# Allegro board steppernug_interface.brd
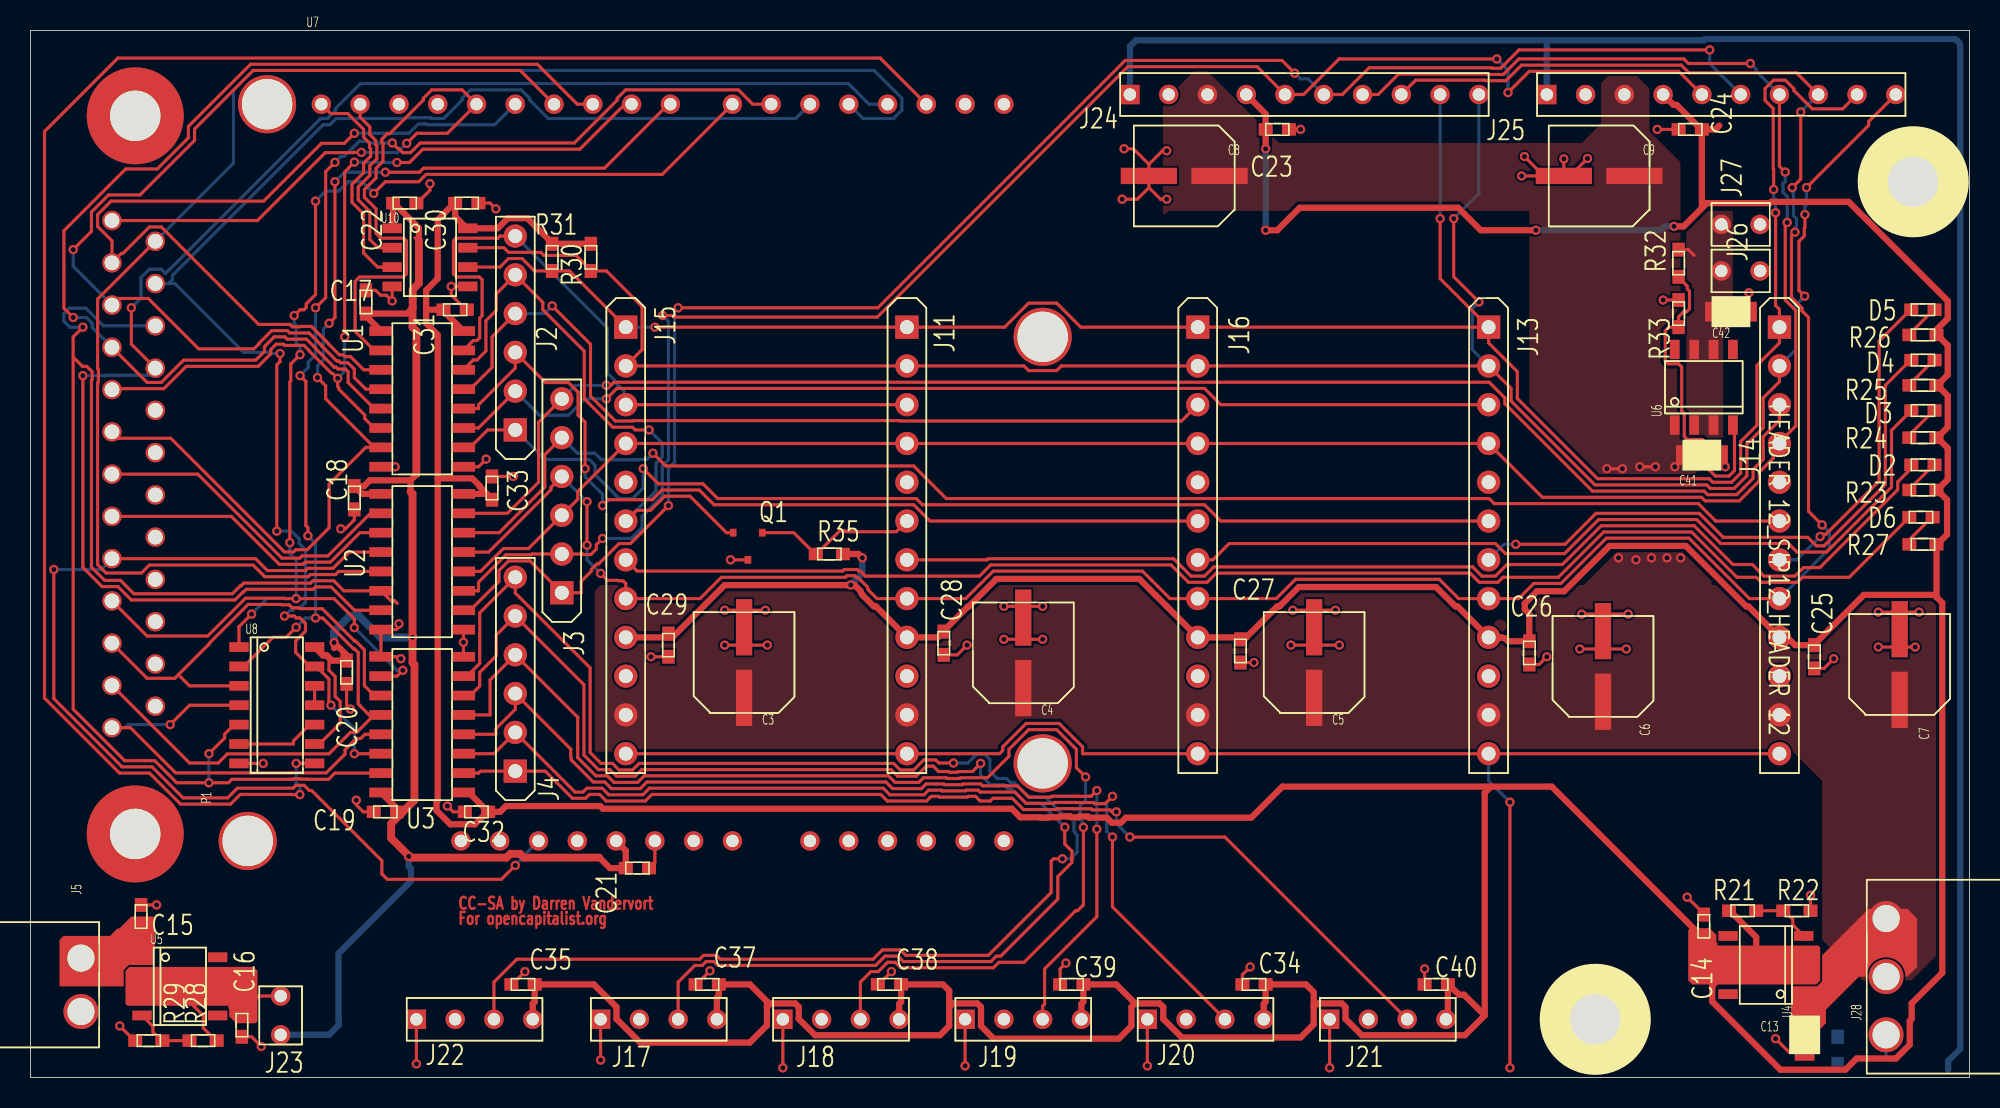
[diagram p0: board, top side]
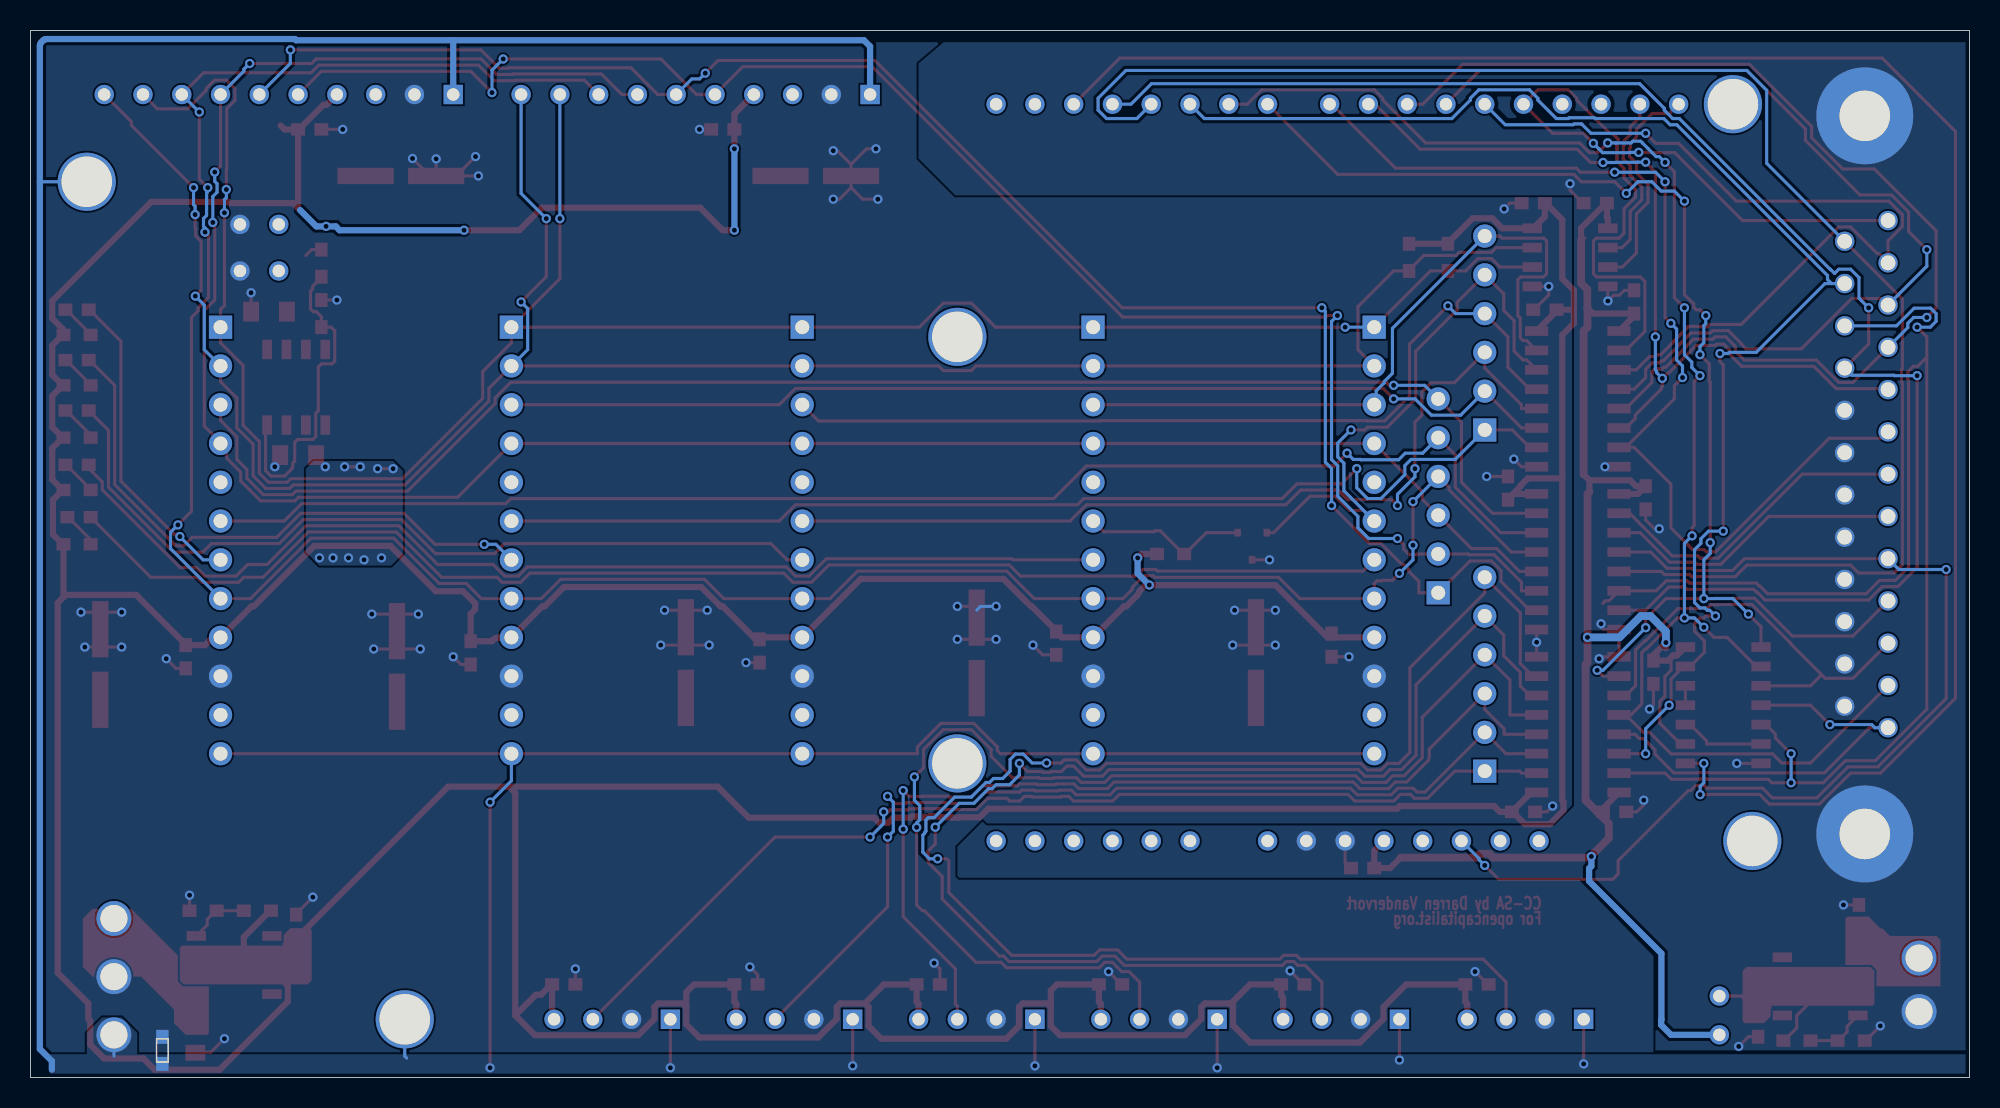
[diagram p1: board, bottom side, seen from below]

Outline 127 x 68.58 mm; copper layers: TOP, BOTTOM. Coordinates in mm from the lower left corner of the outline.
Outline path: 0,68.58 127,68.58 127,0 0,0 0,68.58

## Design rules (mm)
nets with their own width: min track width 0.406; nets VCC_PROTECT VCC_REG

## Placement (name value [footprint] x y rotation side)
C3  47u  [SMD_ELECTRO6_3MM_CAP]  46.74 27.18 0 top
C4  47u  [SMD_ELECTRO6_3MM_CAP]  65.02 27.81 0 top
C5  47u  [SMD_ELECTRO6_3MM_CAP]  84.07 27.18 0 top
C6  47u  [SMD_ELECTRO6_3MM_CAP]  103 26.92 0 top
C7  47u  [SMD_ELECTRO6_3MM_CAP]  122.43 27.05 0 top
C8  47u  [SMD_ELECTRO6_3MM_CAP]  75.56 59.05 90 top
C9  47u  [SMD_ELECTRO6_3MM_CAP]  102.74 59.05 90 top
C13  2.2uf40v  [SMD_0805_CAP]  116.2 2.79 90 top
C14  2.2uf  [SMD_0603_CAP]  109.6 9.91 270 top
C15  2.2uf  [SMD_0603_CAP]  7.24 10.54 270 top
C16  2.2uf  [SMD_0603_CAP]  13.84 3.43 90 top
C17  2.2uf  [SMD_0603_CAP]  21.97 50.8 270 top
C18  2.2uf  [SMD_0603_CAP]  21.21 37.97 90 top
C19  2.2uf  [SMD_0603_CAP]  23.24 17.4 0 top
C20  2.2uf  [SMD_0603_CAP]  20.7 26.54 90 top
C21  2.2uf  [SMD_0603_CAP]  39.75 13.72 180 top
C22  2.2uf  [SMD_0603_CAP]  24.51 57.28 180 top
C23  2.2uf  [SMD_0603_CAP]  81.66 62.1 180 top
C24  2.2uf  [SMD_0603_CAP]  108.71 62.1 0 top
C25  2.2uf  [SMD_0603_CAP]  116.84 27.56 90 top
C26  2.2uf  [SMD_0603_CAP]  98.17 27.81 90 top
C27  2.2uf  [SMD_0603_CAP]  79.25 27.94 90 top
C28  2.2uf  [SMD_0603_CAP]  59.82 28.45 90 top
C29  2.2uf  [SMD_0603_CAP]  41.78 28.32 90 top
C30  2.2uf  [SMD_0603_CAP]  28.57 57.28 180 top
C31  2.2uf  [SMD_0603_CAP]  27.81 50.29 180 top
C32  2.2uf  [SMD_0603_CAP]  29.21 17.4 0 top
C33  2.2uf  [SMD_0603_CAP]  30.23 38.61 270 top
C34  2.2uf  [SMD_0603_CAP]  80.14 6.1 0 top
C35  2.2uf  [SMD_0603_CAP]  32.26 6.1 0 top
C37  2.2uf  [SMD_0603_CAP]  44.32 6.1 0 top
C38  2.2uf  [SMD_0603_CAP]  56.26 6.1 0 top
C39  2.2uf  [SMD_0603_CAP]  68.2 6.1 0 top
C40  2.2uf  [SMD_0603_CAP]  92.08 6.1 0 top
C41  2.2uf40v  [SMD_0805_CAP]  109.47 40.77 180 top
C42  2.2uf12v  [SMD_0805_CAP]  111.38 50.16 180 top
D2  1N6264/TO  [SMD_0603_LED]  123.95 40.13 0 top
D3  1N6264/TO  [SMD_0603_LED]  123.95 43.69 0 top
D4  1N6264/TO  [SMD_0603_LED]  123.95 46.99 0 top
D5  1N6264/TO  [SMD_0603_LED]  123.95 50.29 0 top
D6  1N6264/TO  [SMD_0603_LED]  123.83 36.7 0 top
J2  HEADER 6  [SIP6]  31.75 42.42 180 top
J3  HEADER 6  [SIP6]  34.8 31.75 180 top
J4  HEADER 6  [SIP6]  31.75 20.07 180 top
J5  CON2  [CONN_2PIN_3_5MM]  3.3 4.32 90 top
J11  HEADER 12  [SIP12]  57.4 49.15 0 top
J13  HEADER 12  [SIP12]  95.5 49.15 0 top
J14  HEADER 12  [SIP12]  114.55 49.15 0 top
J15  HEADER 12  [SIP12]  38.99 49.15 0 top
J16  HEADER 12  [SIP12]  76.45 49.15 0 top
J17  HEADER 4  [THRU_HEADER_4]  41.15 3.81 90 top
J18  HEADER 4  [THRU_HEADER_4]  53.09 3.81 90 top
J19  HEADER 4  [THRU_HEADER_4]  65.02 3.81 90 top
J20  HEADER 4  [THRU_HEADER_4]  76.96 3.81 90 top
J21  HEADER 4  [THRU_HEADER_4]  88.9 3.81 90 top
J22  HEADER 4  [THRU_HEADER_4]  29.08 3.81 90 top
J23  JUMPER1  [JUMPER]  16.38 4.06 0 top
J24  HEADER 10  [THRU_HEADER_10]  83.44 64.39 90 top
J25  HEADER 10  [THRU_HEADER_10]  110.74 64.39 90 top
J26  HEADER 2  [FANHEADER2PIN]  112.01 52.83 90 top
J27  HEADER 2  [FANHEADER2PIN]  112.01 55.88 90 top
J28  HEADER 3  [CONN_3PIN_150MIL]  121.54 10.41 270 top
NOREF  -  []  121.79 6.35 0 top
P1  BD25_PPort  [DB25_PPORT]  5.33 56.13 90 top
Q1  Fet  [SOT23]  46.99 34.8 270 top
R21  1k  [SMD_0603_RES]  112.14 10.92 180 top
R22  1k  [SMD_0603_RES]  115.7 10.92 180 top
R23  40  [SMD_0603_RES]  123.95 38.48 0 top
R24  40  [SMD_0603_RES]  123.95 41.91 0 top
R25  40  [SMD_0603_RES]  123.95 45.34 0 top
R26  40  [SMD_0603_RES]  123.95 48.64 0 top
R27  40  [SMD_0603_RES]  123.95 34.92 0 top
R28  1k  [SMD_0603_RES]  11.3 2.41 0 top
R29  1k  [SMD_0603_RES]  7.75 2.41 0 top
R30  2.5k  [SMD_0603_RES]  36.7 53.72 90 top
R31  2.5k  [SMD_0603_RES]  34.16 53.72 90 top
R32  1k  [SMD_0603_RES]  107.95 53.34 90 top
R33  1k  [SMD_0603_RES]  107.95 50.04 270 top
R34  0  [SMD_0603_RES]  118.36 1.78 90 bottom
R35  200  [SMD_0603_RES]  52.32 34.29 0 top
U1  SI8460  [SOIC16NB]  25.65 44.45 0 top
U2  SI8460  [SOIC16NB]  25.65 33.78 0 top
U3  SI8460  [SOIC16NB]  25.65 23.11 180 top
U4  LM317/SO  [SOIC8]  113.67 7.37 180 top
U5  LM317/SO  [SOIC8]  9.78 5.97 0 top
U6  LM317/SO  [SOIC8]  109.6 45.21 90 top
U7  -  [ARDUINO_UNO_V3]  0.25 12.95 0 top
U8  74HCT11  [SOIC14]  16.13 24.38 0 top
U10  ADUM1250  [SOIC8]  26.16 53.72 0 top
X6  Mount  [MOUNT_125MIL]  102.49 3.81 0 top
X7  Mount  [MOUNT_125MIL]  123.32 58.67 0 top

## Library data of the parts
C3-C9 = C_elect_0
C13-C35 C37-C42 = C
D2-D6 = 1N6264/TO_0
J2-J4 = HEADER 6: User Part Number: ***
J5 = CON2
J11 J13-J16 = HEADER 12: User Part Number: ***
J17-J22 = HEADER 4_0
J23 = JUMPER1_0
J24 J25 = HEADER 10_0
J26 J27 = HEADER 2
J28 = HEADER 3
P1 = BD25_PPort_0
Q1 = MOSFET N DGS_1
R21-R35 = R
U1-U3 = SI8460
U4-U6 = LM317/SO_1: Tolerance: ***; User Part Number: ***
U7 = ARDUINO_UNO_V3_0
U8 = 74HCT11: Tolerance: ***; User Part Number: ***
U10 = ADUM1250: Tolerance: ***; User Part Number: ***
X6 X7 = Mount

## Footprints (pads in the part's own frame, mm; a bottom-side part is the same pattern mirrored in y, then rotated)
ARDUINO_UNO_V3
  round 1.27 hole 0.813: 1(18.796,50.8) 2(21.336,50.8) 3(23.876,50.8) 4(26.416,50.8) 5(28.956,50.8) 6(31.496,50.8) 7(34.036,50.8) 8(36.576,50.8) 9(39.116,50.8) 10(41.656,50.8) 11(45.72,50.8) 12(48.26,50.8) 13(50.8,50.8) 14(53.34,50.8) 15(55.88,50.8) 16(58.42,50.8) 17(60.96,50.8) 18(63.5,50.8) 19(63.5,2.54) 20(60.96,2.54) 21(58.42,2.54) 22(55.88,2.54) 23(53.34,2.54) 24(50.8,2.54) 25(45.72,2.54) 26(43.18,2.54) 27(40.64,2.54) 28(38.1,2.54) 29(35.56,2.54) 30(33.02,2.54) 31(30.48,2.54) 32(27.94,2.54)
  round 3.81 hole 3.302: 33(15.24,50.8) 34(66.04,35.56) 35(66.04,7.62) 36(13.97,2.54)
CONN_2PIN_3_5MM
  round 2.286 hole 1.778: 1(0,0) 2(3.5,0)
CONN_3PIN_150MIL
  round 2.286 hole 1.778: 1(0,0) 2(3.81,0) 3(7.62,0)
DB25_PPORT
  round 1.27 hole 0.965: 1(0,0) 2(-2.769,0) 3(-5.537,0) 4(-8.306,0) 5(-11.074,0) 6(-13.843,0) 7(-16.612,0) 8(-19.38,0) 9(-22.149,0) 10(-24.917,0) 11(-27.686,0) 12(-30.455,0) 13(-33.223,0) 14(-1.36,-2.84) 15(-4.129,-2.84) 16(-6.897,-2.84) 17(-9.666,-2.84) 18(-12.434,-2.84) 19(-15.203,-2.84) 20(-17.972,-2.84) 21(-20.74,-2.84) 22(-23.509,-2.84) 23(-26.277,-2.84) 24(-29.046,-2.84) 25(-31.815,-2.84)
  round 6.35 hole 3.302: 26(6.858,-1.524) 27(-40.183,-1.524)
FANHEADER2PIN
  round 1.27 hole 0.813: 1(0,1.27) 2(0,-1.27)
JUMPER
  round 1.27 hole 0.813: 1(0,1.27) 2(0,-1.27)
MOUNT_125MIL
  round 3.81 hole 3.302: 1(0,0)
SIP6
  rect 1.524x1.524 hole 0.914: 1(0,0)
  round 1.524 hole 0.914: 2(0,-2.54) 3(0,-5.08) 4(0,-7.62) 5(0,-10.16) 6(0,-12.7)
SIP12
  rect 1.524x1.524 hole 0.914: 1(0,0)
  round 1.524 hole 0.914: 2(0,-2.54) 3(0,-5.08) 4(0,-7.62) 5(0,-10.16) 6(0,-12.7) 7(0,-15.24) 8(0,-17.78) 9(0,-20.32) 10(0,-22.86) 11(0,-25.4) 12(0,-27.94)
SMD_0603_CAP
  rect 0.914x0.813 smd: 1(-0.762,0) 2(0.762,0)
SMD_0603_LED
  rect 0.914x0.813 smd: 1(-0.762,0) 2(0.762,0)
SMD_0603_RES
  rect 0.914x0.813 smd: 1(-0.889,0) 2(0.889,0)
SMD_0805_CAP
  rect 1.041x1.295 smd: 1(-1.175,0) 2(1.175,0)
SMD_ELECTRO6_3MM_CAP
  rect 1.067x3.683 smd: 1(0,-2.311) 2(0,2.311)
SOIC8
  rect 1.27x0.635 smd: 1(-2.477,1.905) 2(-2.477,0.635) 3(-2.477,-0.635) 4(-2.477,-1.905) 5(2.477,-1.905) 6(2.477,-0.635) 7(2.477,0.635) 8(2.477,1.905)
SOIC14
  rect 1.27x0.635 smd: 1(-2.477,3.81) 2(-2.477,2.54) 3(-2.477,1.27) 4(-2.477,0) 5(-2.477,-1.27) 6(-2.477,-2.54) 7(-2.477,-3.81) 8(2.477,-3.81) 9(2.477,-2.54) 10(2.477,-1.27) 11(2.477,0) 12(2.477,1.27) 13(2.477,2.54) 14(2.477,3.81)
SOIC16NB
  rect 1.524x0.635 smd: 1(-2.7,4.445) 2(-2.7,3.175) 3(-2.7,1.905) 4(-2.7,0.635) 5(-2.7,-0.635) 6(-2.7,-1.905) 7(-2.7,-3.175) 8(-2.7,-4.445) 9(2.7,-4.445) 10(2.7,-3.175) 11(2.7,-1.905) 12(2.7,-0.635) 13(2.7,0.635) 14(2.7,1.905) 15(2.7,3.175) 16(2.7,4.445)
SOT23
  rect 0.508x0.432 smd: 1(-0.889,0.94) 2(-0.889,-0.965) 3(0.889,0)
THRU_HEADER_4
  rect 1.27x1.27 hole 0.813: 1(0,3.81)
  round 1.27 hole 0.813: 2(0,1.27) 3(0,-1.27) 4(0,-3.81)
THRU_HEADER_10
  rect 1.27x1.27 hole 0.813: 1(0,11.43)
  round 1.27 hole 0.813: 2(0,8.89) 3(0,6.35) 4(0,3.81) 5(0,1.27) 6(0,-1.27) 7(0,-3.81) 8(0,-6.35) 9(0,-8.89) 10(0,-11.43)

## Nets
GND_PROTECT: C15.1 C16.1 C17.1 C18.1 C19.1 C20.1 C21.1 C22.1 J5.1 P1.18 P1.19 P1.20 P1.21 P1.22 P1.23 P1.24 P1.25 P1.26(MNT) P1.27(MNT.) R29.1 U1.8(GND1) U2.8(GND1) U3.9(GND2) U7.26(GND.) U7.27(GND..) U8.7(GND) U10.4(GND1)
VCC_FAN: C42.2 J26.1 J27.1 R32.2 U6.2(VOUT) U6.3(VOUT.) U6.6(.VOUT) U6.7(.VOUT.)
VCC_PROTECT: C17.2 C18.2 C19.2 C20.2 C21.2 C22.2 J23.2 U1.1(VDD1) U2.1(VDD1) U3.16(VDD2) U7.28(5V) U8.9(3A) U8.14(VCC) U10.1(VDD1)
VCC_REG: C14.2 C23.2 C24.2 C25.2 C26.2 C27.2 C28.2 C29.2 C30.2 C31.2 C32.2 C33.2 C34.2 C35.2 C37.2 C38.2 C39.2 C40.2 J11.9 J13.9 J14.9 J15.9 J16.9 J17.4 J18.4 J19.4 J20.4 J21.4 J22.4 J24.4 J25.4 R21.2 R23.2 R24.2 R25.2 R26.2 R27.2 R30.2 R31.2 R35.2 U1.16(VDD2) U2.16(VDD2) U3.1(VDD1) U4.2(VOUT) U4.3(VOUT.) U4.6(.VOUT) U4.7(.VOUT.) U10.8(VDD2)
0: C3.2(-) C4.2(-) C5.2(-) C6.2(-) C7.2(-) C8.2(-) C9.2(-) C13.1 C14.1 C23.1 C24.1 C25.1 C26.1 C27.1 C28.1 C29.1 C30.1 C31.1 C32.1 C33.1 C34.1 C35.1 C37.1 C38.1 C39.1 C40.1 C41.1 C42.1 J11.10 J13.10 J14.10 J15.10 J16.10 J17.2 J18.2 J19.2 J20.2 J21.2 J22.2 J24.2 J25.2 J26.2 J27.2 J28.2 Q1.3(S) R22.1 R33.1 R34.2 U1.9(GND2) U2.9(GND2) U3.8(GND1) U10.5(GND2)
CLKA: P1.1 U1.2(A1) U7.5(13)
CLKB: P1.3 U1.4(A3) U7.7(11)
CLKC: P1.5 U1.6(A5) U7.9
CLKD: P1.7 U2.2(A1)
DIRA: P1.2 U1.3(A2) U7.6(12)
DIRB: P1.4 U1.5(A4) U7.8(10)
DIRC: P1.6 U1.7(A6) U7.10(8)
DIRD: P1.8 U2.3(A2)
ENABLE: J3.3 J11.4 J13.4 J14.4 J15.4 J16.4 J24.7 J25.7 U2.12(B4)
ENABLE_ISO: P1.14 U2.5(A4) U7.14(4)
HOMEX: J4.6 J22.3 U3.7(A6)
HOMEX_ISO: P1.10 U3.10(B6) U7.11(7) U8.1(1A)
HOMEY: J4.4 J18.3 U3.5(A4)
HOMEY_ISO: P1.12 U3.12(B4) U7.12(6) U8.2(1B)
HOMEZ: J4.2 J20.3 U3.3(A2)
HOMEZ_ISO: P1.15 U3.14(B2) U7.13(5) U8.13(1C)
LIMITX: J4.5 J17.3 U3.6(A5)
LIMITX_ISO: P1.11 U3.11(B5) U8.3(2A)
LIMITY: J4.3 J19.3 U3.4(A3)
LIMITY_ISO: P1.13 U3.13(B3) U8.4(2B)
LIMITZ: J4.1 J21.3 U3.2(A1)
LIMITZ_ISO: P1.16 U2.6(A5) U3.15(B1) U8.5(2C)
RESET: J3.4 J11.8 J13.8 J14.8 J15.8 J16.8 J24.8 J25.8 U2.13(B3)
RESET_ISO: P1.9 U2.4(A3) U7.30(RESET)
SCL: J11.1 J13.1 J14.1 J15.1 J16.1 J24.9 J25.9 R31.1 U10.6(SCL2)
SCL_ISO: U7.1(SCL) U10.3(SCL1)
SDA: J11.2 J13.2 J14.2 J15.2 J16.2 J24.10 J25.10 R30.1 U10.7(SDA2)
SDA_ISO: U7.2(SDA) U10.2(SDA1)
SHEILDING_GND: J11.12 J13.12 J14.12 J15.12 J16.12 J17.1 J18.1 J19.1 J20.1 J21.1 J22.1 J24.1 J25.1 J28.3 R34.1 X6.1(.) X7.1(.)
SPAREOUT: J3.2 J24.5 J25.5 U2.11(B5)
SPINDLE_CNTRL: J3.1 J24.6 J25.6 U2.10(B6)
SPINDLE_CNTRL_ISO: P1.17 U2.7(A6) U7.15(INT_B)
VMOT: C3.1(+) C4.1(+) C5.1(+) C6.1(+) C7.1(+) C8.1(+) C9.1(+) C13.2 C41.2 J11.11 J13.11 J14.11 J15.11 J16.11 J24.3 J25.3 J28.1 U4.1(VIN) U6.1(VIN)
N92754: D4.1(CATHODE) J13.7
N92822: D5.1(CATHODE) J14.7
N92972: C15.2 J5.2 U5.1(VIN)
N94102: D2.1(CATHODE) J11.7
N94406: J2.3 J16.6 U1.12(B4)
N94454: J2.1 J13.6 U1.10(B6)
N94482: J3.5 J14.6 U2.14(B2)
N94508: J2.6 J11.3 J15.3 U1.15(B1)
N94542: D6.1(CATHODE) J15.7
N94754: R21.1 R22.2 U4.4(ADJ)
N94942: J2.4 J16.3 U1.13(B3)
N94982: J2.2 J13.3 U1.11(B5)
N95000: J3.6 J14.3 U2.15(B1)
N95234: C16.2 J23.1 R28.2 U5.2(VOUT) U5.3(VOUT.) U5.6(.VOUT) U5.7(.VOUT.)
N95510: D3.1(CATHODE) J16.7
N95918: R28.1 R29.2 U5.4(ADJ)
N96112: U8.6(2Y) U8.10(3B)
N96120: U7.16(INT_A) U8.8(3Y)
N96124: U8.11(3C) U8.12(1Y)
N105302: R32.1 R33.2 U6.4(ADJ)
N121730: J2.5 J15.6 Q1.2(G) U1.14(B2)
N121766: J11.6 Q1.1(D) R35.1
N941580: D6.2(ANODE) R27.1
N954500: D2.2(ANODE) R23.1
N954660: D3.2(ANODE) R24.1
N954820: D4.2(ANODE) R25.1
N954980: D5.2(ANODE) R26.1

Pads without a net: J11 5; J13 5; J14 5; J15 5; J16 5; U4 5 8; U5 5 8; U6 5 8; U7 3 4 17 18 19 20 21 22 23 24 25 29 31 32 33 34 35 36

## Via types
v1: diameter 0.61, hole 0.33, TOP to BOTTOM, 186 vias

## Routing (per net, layer and track width the routed paths; a pad name or vN(x,y) marks a point on that pad's centre or on a via; arc(x,y) is an arc through that point)
GND_PROTECT: length 23.6
  TOP w0.203: C15.1 v1(8.25,11.3) ; U3.9 22.95,29.34 23.94,29.34 24.13,29.52 v1(24.13,29.72) ; U3.9 22.7,27.81 22.28,27.81 ; U3.9 24.13,27.56 v1(24.26,27.43) ; U1.8 v1(23.88,40) ; v1(26.16,58.55) 26.16,58.12 25.32,57.28 C22.1 ; C21.1 40.89,14.1 U7.27 ; C19.1 21.79,17.4 21.34,17.86 v1(21.34,18.16) ; U8.7 v1(15.24,20.57) ; C20.1 20.7,24.38 v1(20.96,24.13) ; v1(15.11,2.03) 14.48,2.67 C16.1 ; v1(20.32,35.94) 20.62,35.94 21.21,36.53 C18.1 ; C17.1 22.61,51.56 22.93,51.24 23.31,51.24 v1(23.69,50.86) U10.4 ; R29.1 6.81,2.41 v1(5.84,3.38)
VCC_FAN: length 1.2
  TOP w0.203: R32.2 108.59,54.23 108.97,53.85
VCC_PROTECT: length 112.2
  TOP w0.203: 25.44,54.86 25.31,54.99 25.18,54.99 ; 19.15,27.65 19.25,27.55 19.37,27.55 19.55,27.37 19.55,26.67 19.95,26.27 19.95,24.97 20.28,24.64 20.28,23.2 18.92,21.84 U8.9
  TOP w0.406: U7.28 38.99,14.86 C21.2 37.95,13.72 37.26,14.4 ; U1.1 21.97,49.88 C17.2 24.65,50.04 25.02,50.41 ; U2.1 21.72,38.23 C18.2 21.84,38.73 22.23,39.12 24.89,39.12 ; U10.1 23.69,56.27 23.75,56.34 C22.2 23.8,57.28 25.44,55.64 25.44,54.86 ; 24.89,38.35 24.89,39.12 ; 24.89,39.12 25.27,39.5 ; 24.38,17.4 C19.2 24,17.62 U3.16 ; 19.88,28.12 v1(19.88,28.49) 20.7,27.67 C20.2 19.75,27.3 19.41,27.65 19.15,27.65 U8.14
  TOP w0.508: v1(24.77,14.48) 24.77,14.53 ; 24.77,14.53 23.62,15.67 23.62,16.64 25.15,18.16 25.15,27.04 25.02,27.17 v1(25.02,28.83) 25.02,38.23 24.89,38.35 ; 24.77,14.53 24.89,14.4 31.18,14.4 31.43,14.65 32.07,14.65 32.32,14.4 37.26,14.4 ; 25.27,39.5 25.27,48.89 25.02,49.15 25.02,50.41 25.03,50.42 25.03,51.62 25.44,52.03 25.44,54.86
  BOTTOM w0.406: v1(24.77,14.48) 24.77,13.84 24.91,13.69 24.91,12.86 20.18,8.13 20.18,3.81 20.19,3.76 20.2,3.74 20.2,3.44 19.55,2.79 J23.2
  BOTTOM w0.508: v1(19.88,28.49) 19.88,29.22 20.89,30.23 21.52,30.23 22.92,28.83 v1(25.02,28.83)
VCC_REG: length 531.6
  TOP w0.406: J18.4 56.9,4.83 57.02,4.95 C38.2 59.77,6.1 60.17,5.69 60.17,4.61 ; 124.89,38.48 125.58,39.17 125.58,41.22 124.89,41.91 ; 124.89,38.48 125.53,37.84 125.53,35.57 124.89,34.92 R27.2 124.84,31.47 ; 124.89,38.48 R23.2 ; U1.16 27.05,50.2 C31.2 25.91,50.29 ; C14.2 109.6,9.09 99.64,19.05 95.66,19.05 ; C24.2 109.42,62.1 107.82,63.71 107.62,63.71 J25.4 ; C24.2 110.36,62.1 110.62,62.36 ; C24.2 109.47,56.95 ; 124.89,41.91 R24.2 ; 124.89,41.91 125.58,42.6 125.58,44.65 124.89,45.34 ; 124.84,31.47 125.22,31.09 125.22,6.85 123.22,4.85 123.22,3.84 123.09,3.71 123.09,2.15 122.18,1.24 119.61,1.24 118.87,0.51 114.61,0.51 110.15,4.98 110.15,6.01 110.87,6.73 U4.7 ; 124.84,31.47 124.7,31.61 120.08,31.61 116.84,28.37 C25.2 115.57,28.32 115.06,28.83 J14.9 112.52,30.86 112.38,30.86 108.42,34.82 103.42,34.82 100.45,31.85 98.68,31.85 97.87,31.05 97.87,30.67 98.17,30.37 C26.2 96.79,28.57 96.75,28.61 96.75,28.62 96.74,28.63 96.67,28.7 96.6,28.75 96.51,28.79 96.41,28.81 96.31,28.81 96.21,28.8 96.12,28.76 96.05,28.72 95.61,28.72 J13.9 93.47,30.86 93.33,30.86 92.06,32.12 83.07,32.12 81.9,30.96 81.9,30.95 81.82,30.88 81.81,30.87 81.79,30.86 81.66,30.86 79.63,28.83 ; R21.2 111.3,10.92 113.03,9.19 113.03,8.38 ; 79.63,28.83 79.5,28.7 C27.2 ; 79.63,28.83 J16.9 74.42,30.86 73.7,31.58 73.7,31.58 72.62,32.66 63.27,32.66 61.47,30.86 61.42,30.86 59.82,29.26 C28.2 59.44,28.83 J11.9 55.37,30.86 55.23,30.86 54.51,31.58 54.42,31.72 54.35,31.87 53.98,32.25 53.47,32.25 ; 124.89,45.34 R25.2 ; 124.89,45.34 125.58,46.02 125.58,47.96 124.89,48.64 ; J20.4 80.77,4.83 80.9,4.95 C34.2 83.54,6.1 84.05,5.59 84.05,4.61 ; 25.91,50.29 25.91,51.56 26.67,52.32 26.67,56.18 27.76,57.28 C30.2 27.81,56.39 28.57,55.63 U10.8 30.61,55.63 31.27,56.29 32.54,56.29 34.16,54.66 R31.2 R30.2 ; 25.91,50.29 25.91,49.4 26.67,48.64 26.67,39.24 ; 84.05,4.61 84.29,4.85 85.89,4.85 86.13,4.61 86.13,3.84 87.2,2.77 93.95,2.77 95.25,4.06 ; 84.05,4.61 84.05,3.48 83.19,2.62 75.41,2.62 74.19,3.84 74.19,4.61 73.96,4.85 72.35,4.85 ; J15.9 41.78,28.83 ; 41.78,28.83 42.04,28.83 45.46,32.25 53.47,32.25 ; 41.78,28.83 C29.2 ; 124.89,48.64 R26.2 ; 124.89,48.64 124.89,49.03 125.58,49.72 125.58,50.87 119.09,57.35 114.01,57.35 113.93,57.28 109.8,57.28 109.47,56.95 ; 53.47,32.25 53.47,32.26 v1(53.72,32.26) ; 95.25,4.06 95.25,18.64 95.66,19.05 ; 95.25,4.06 93.89,5.42 93.56,5.42 92.89,6.1 C40.2 92.84,3.94 J21.4 ; C32.2 28.7,18.67 U3.1 ; C32.2 30.76,17.4 31.14,17.78 37.32,17.78 37.49,17.6 64.27,17.6 64.83,17.04 66.13,17.04 66.16,17.02 66.6,17.02 66.62,17.04 67.39,17.04 67.45,17.1 68.04,17.1 68.04,17.09 68.11,17.09 68.16,17.04 68.62,17.04 68.67,17.09 69.26,17.09 69.33,17.02 70.5,17.02 70.83,16.69 71.41,16.69 71.74,17.02 79.96,17.02 81.99,19.05 95.66,19.05 ; C32.2 29.92,17.4 29.11,16.59 27.49,16.59 26.59,17.49 26.59,18.07 26.67,18.15 26.67,39.24 ; v1(80.9,55.5) 81.66,55.5 83.13,56.97 93.51,56.97 94.99,55.5 v1(98.6,55.5) ; J22.4 32.89,4.83 33.02,4.95 C35.2 36.9,6.1 38.38,4.61 38.38,3.84 39.93,2.29 47.11,2.29 48.23,3.41 48.23,4.61 ; 60.17,4.61 60.41,4.85 62.02,4.85 62.26,4.61 62.26,3.37 63.09,2.54 71.28,2.54 72.11,3.37 72.11,4.61 72.35,4.85 ; 60.17,4.61 60.17,3.37 59.57,2.77 51.38,2.77 50.32,3.84 50.32,4.61 50.08,4.85 48.47,4.85 48.23,4.61 ; 109.47,56.95 108.28,55.75 v1(107.65,55.75) ; v1(80.9,60.83) C23.2 80.9,63.12 J24.4 ; 26.67,39.24 28.93,39.24 29.41,38.76 29.41,38.71 30.23,37.9 C33.2 29.85,38.23 U2.16 ; v1(54.48,34.04) 54.23,34.29 R35.2 ; J17.4 44.96,5.23 45.09,5.36 C37.2 47.12,6.1 48.23,4.98 48.23,4.61 ; 72.35,4.85 71.1,6.1 C39.2 68.96,4.95 68.83,4.83 J19.4
  BOTTOM w0.406: v1(98.6,55.5) 106.76,55.5 107.01,55.75 v1(107.65,55.75) 108.28,55.75 109.35,56.82 ; v1(53.72,32.26) 54.48,33.02 v1(54.48,34.04) ; v1(80.9,55.5) v1(80.9,60.83)
0: length 92.5
  TOP w0.203: C31.1 28.52,50.29 27.56,51.26 v1(27.56,51.82) U10.5 ; 102.79,28.07 v1(104.52,28.07) ; 102.79,28.07 v1(101.47,28.07) ; 102.79,28.07 103,28.27 C6.2 103,30.15 102.79,30.35 ; 102.79,30.35 v1(104.65,30.35) ; 102.79,30.35 v1(101.6,30.35) ; C38.1 55.55,6.1 v1(56.39,6.93) ; v1(74.42,60.71) 74.14,60.71 73.25,59.82 ; v1(45.47,30.61) 46.53,30.61 46.74,30.4 ; v1(27.3,17.78) 27.69,17.4 C32.1 ; v1(121.03,30.48) 122.22,30.48 ; 122.22,30.48 v1(123.7,30.48) ; 122.22,30.48 122.43,30.28 C7.2 122.43,28.4 122.22,28.19 ; v1(29.85,40.51) 29.34,40 U1.9 ; v1(30.48,56.9) 30.1,57.28 C30.1 ; R33.1 v1(106.93,50.93) ; C28.1 60.71,27.69 v1(61.34,28.32) ; C26.1 98.81,27.05 v1(99.31,27.56) ; 73.25,59.82 72.24,60.83 v1(71.63,60.83) ; 73.25,59.82 C8.2 73.25,58.29 ; v1(108.51,11.81) 109.6,10.72 C14.1 ; 46.53,28.32 46.74,28.52 C3.2 46.74,30.4 ; 46.53,28.32 v1(48.26,28.32) ; 46.53,28.32 v1(45.47,28.32) ; 83.87,28.32 v1(85.73,28.32) ; 83.87,28.32 v1(82.55,28.32) ; 83.87,28.32 84.07,28.52 C5.2 84.07,30.4 ; 46.74,30.4 46.94,30.61 v1(48.13,30.61) ; C37.1 43.61,6.1 v1(44.5,6.99) ; v1(67.82,7.49) 67.44,7.11 C39.1 ; v1(63.75,30.86) 64.69,30.86 64.9,30.66 64.9,30.48 ; 122.22,28.19 v1(123.44,28.19) ; 122.22,28.19 v1(121.03,28.19) ; 84.07,30.4 83.87,30.61 v1(82.68,30.61) ; 84.07,30.4 84.28,30.61 v1(85.47,30.61) ; C42.1 v1(112.55,51.4) ; C23.1 v1(83.19,62.1) ; C24.1 v1(106.55,62.1) ; C25.1 117.48,26.8 v1(118.11,27.43) ; 64.9,30.48 64.9,29.97 65.02,30.1 C4.2 ; 64.9,30.48 65.28,30.86 v1(66.29,30.86) ; C29.1 v1(40.64,27.56) ; R22.1 v1(116.59,11.94) ; v1(114.3,2.54) 115.19,1.65 116.2,1.65 C13.1 ; v1(32.38,6.93) 31.55,6.1 C35.1 ; 99.12,59.05 v1(97.66,59.05) ; 99.12,59.05 C9.2 ; 99.12,59.05 v1(97.85,60.32) ; C40.1 v1(91.31,7.11) ; C9.2 v1(100.43,60.17) ; C9.2 100.84,59.05 v1(101.98,60.2) ; C34.1 79.38,6.73 v1(79.88,7.24) ; v1(111,40) 111,40.31 110.65,40.66 C41.1 ; C33.1 v1(31.62,39.37) ; 73.25,58.29 74.02,57.53 v1(74.42,57.53) ; 73.25,58.29 72.49,57.53 v1(71.5,57.53) ; v1(66.29,28.7) v1(63.75,28.7) ; C27.1 v1(80.14,27.18) ; U3.8 v1(28.35,28.51) 28.35,29.34 ; Q1.3 v1(45.85,33.91)
  BOTTOM w0.203: v1(63.75,30.86) 64.77,30.86 65.02,30.61
CLKA: length 55.5
  TOP w0.203: P1.1 14.86,56.13 19.3,60.58 21.11,60.58 21.13,60.6 v1(21.67,60.6) ; 22.95,47.62 22.51,47.62 21.26,48.87 21.26,52.15 21.55,52.44 24.42,52.44 24.63,52.64 24.63,54.8 24.45,54.98 22.95,54.98 22.63,55.3 22.63,56.9 21.87,57.66 21.87,58.16 22.15,58.45 22.63,58.92 22.63,59.55 23.09,60.01 23.09,61.19 23.01,61.26 23.01,61.47 23.37,61.82 23.53,61.82 25.73,64.03 25.73,64.14 26.28,64.69 28.27,64.69 U7.5 27.3,61.85 25.3,61.85 v1(24.64,61.19)
  BOTTOM w0.203: v1(21.67,60.6) 22.2,60.6 22.22,60.58 24.03,60.58 24.26,60.81 24.26,60.81 v1(24.64,61.19)
CLKB: length 64.7
  TOP w0.203: U7.7 32.08,65.96 14.58,65.96 10.74,62.13 10.74,61.38 7.17,57.81 5.11,57.81 3.99,56.69 3.99,55.42 v1(2.79,54.23) ; P1.3 5.77,51.03 7.71,51.03 11.01,47.73 14.63,47.73 14.96,48.06 14.96,48.09 15.79,48.92 16.83,48.92 16.98,48.77 18.25,48.77 18.97,48.04 18.97,48.04 19.08,47.94 19.08,47.91 20.06,46.93 20.19,46.93 20.31,46.81 20.79,46.81 21.21,46.4 21.21,45.84 21.96,45.09 22.95,45.09
  BOTTOM w0.203: P1.3 2.79,53.14 v1(2.79,54.23)
CLKC: length 56.2
  TOP w0.203: v1(24,59.94) 24.82,59.94 25.69,60.81 35.98,60.81 38.93,63.75 U7.9 ; v1(21.21,59.96) 20.83,59.58 20.83,59.57 20.57,59.31 v1(20.57,48.51) ; 22.95,42.55 22.51,42.55 21.89,43.17 21.89,43.39 20.19,45.09 20.19,45.19 20.12,45.26 v1(20.12,45.8) 19.8,46.12 19.72,46.12 18.26,47.58 18.26,47.6 17.91,47.96 17.4,47.96 16.64,47.96 16.56,48.03 16.09,48.03 15.73,47.68 15.73,47.42 15.72,47.41 15.72,47.39 14.92,46.58 10.19,46.58 8.73,45.12 5.4,45.12 P1.5
  BOTTOM w0.203: v1(20.57,48.51) 20.57,46.35 20.5,46.28 20.5,46.17 v1(20.12,45.8) ; v1(21.21,59.96) 21.74,59.96 21.76,59.94 23.15,59.94 23.16,59.94 v1(24,59.94)
CLKD: length 21.1
  TOP w0.203: 22.95,36.96 22.27,36.96 19.47,34.16 17.78,34.16 17.64,34.02 16.46,34.02 10.96,39.52 P1.7
DIRA: length 56.9
  TOP w0.203: 23.4,46.35 U1.3 21.82,46.35 20.96,47.22 20.6,47.22 20.48,47.34 20.23,47.34 19.48,48.08 19.48,48.1 19.38,48.21 19.38,48.21 18.89,48.7 18.39,49.2 17.68,49.2 17.65,49.17 17.15,49.17 16.99,49.33 16.32,49.33 16.32,49.33 14.95,49.33 8.56,55.71 7.78,55.71 6.05,53.98 5.94,53.98 P1.2 5.33,54.8 4.39,55.74 4.39,56.52 5.27,57.4 15.27,57.4 19.05,61.19 20.55,61.19 v1(21.21,61.85)
  BOTTOM w0.203: v1(21.21,61.85) 24.79,61.85 25.4,62.46 25.91,62.46 25.96,62.41 30.4,62.41 U7.6
DIRB: length 72.5
  TOP w0.203: U7.8 35.81,63.75 33.2,66.37 14.41,66.37 10.34,62.3 10.34,61.55 8.3,59.51 6.23,59.51 2.18,55.46 2.18,50.39 v1(2.79,49.78) ; U1.5 22.51,43.81 20.8,45.52 20.8,46.23 20.62,46.41 20.14,46.41 20.02,46.53 19.89,46.53 18.67,47.74 18.67,47.77 18.57,47.87 18.57,47.87 18.08,48.36 17.23,48.36 16.81,48.36 16.66,48.51 15.96,48.51 15.37,47.92 15.37,47.89 15.33,47.85 15.33,47.59 15.32,47.58 15.32,47.56 14.75,46.99 10.02,46.99 8.56,45.53 7.63,45.53 P1.4
  BOTTOM w0.203: v1(2.79,49.78) 3.66,49.78 4.04,49.4 4.04,49.12 P1.4
DIRC: length 68.9
  TOP w0.203: v1(19.94,58.67) 19.94,49.78 v1(19.56,49.4) ; 22.51,41.27 21.96,41.27 19.56,38.87 19.56,36.01 18.12,34.57 17.37,34.57 17.23,34.43 16.63,34.43 9.18,41.87 5.75,41.87 P1.6 ; 22.51,41.27 U1.7 ; 22.51,41.27 19.33,44.46 19.33,45.31 v1(18.8,45.85) ; U7.10 41.78,63.75 37.59,59.56 25.74,59.56 25.47,59.3 v1(23.24,59.3)
  BOTTOM w0.203: v1(23.24,59.3) 20.56,59.3 v1(19.94,58.67) ; v1(19.56,49.4) 19.18,49.03 19.18,46.99 18.8,46.61 v1(18.8,45.85)
DIRD: length 19.8
  TOP w0.203: U2.3 21.57,35.69 19.64,33.76 17.99,33.76 17.85,33.61 16.29,33.61 13.15,36.75 P1.8
ENABLE: length 148.4
  TOP w0.203: v1(112.65,66.42) 108.59,66.42 108.29,66.72 97.48,66.72 96.46,65.7 95.46,65.7 95.43,65.74 89.61,65.74 88.27,64.39 J24.7 ; 114.55,41.94 114.15,41.53 ; 114.55,41.94 J14.4 114.15,41.53 ; 114.55,41.94 114.88,41.94 115.62,42.67 115.62,50.24 114.94,50.93 114.94,55.88 v1(115.06,56.01) ; 114.15,41.53 114.15,40.57 113.23,39.65 113.23,39.08 112.64,38.48 111.92,37.77 109.68,37.77 109.45,38 99.03,38 J13.4 J16.4 J11.4 J15.4 ; U2.12 29.47,33.15 30.97,34.65 32.61,34.65 J3.3 35.84,37.87 35.84,38.38 38.86,41.4 ; v1(114.94,59.31) 114.55,59.69 J25.7
  BOTTOM w0.203: v1(115.06,56.01) 115.06,57.71 114.78,57.99 114.78,58.55 114.94,58.7 v1(114.94,59.31) ; 114.91,64.03 J25.7 113.03,65.92 113.03,66.04 v1(112.65,66.42)
ENABLE_ISO: length 104.2
  TOP w0.203: U2.5 20.18,33.15 19.98,32.94 18.33,32.94 18.18,32.8 15.35,32.8 14.58,33.57 7.78,33.57 7.26,33.05 4.94,33.05 4.39,33.6 4.39,45.5 4.45,45.55 4.45,46.4 4.39,46.45 4.39,50.99 P1.14
  BOTTOM w0.203: U7.14 54.53,62.81 56.52,62.81 57.07,63.36 57.07,64.14 55.25,65.96 14.58,65.96 13.28,64.67 13.28,59.88 P1.14
HOMEX: length 105.1
  TOP w0.203: U3.7 28.35,26.45 28.75,26.45 29.42,27.12 29.42,30.44 J4.6 31.75,31.73 36.65,26.83 36.65,21.29 37.37,20.57 38.12,20.57 38.55,20.14 39.43,20.14 39.86,20.57 56.53,20.57 56.96,20.14 57.85,20.14 58.51,20.8 59.29,20.8 59.49,20.6 v1(60.45,20.6) ; J22.3 30.35,6.25 31.85,7.75 43.83,7.75 44.08,8 44.92,8 45.18,7.75 55.19,7.75 55.8,8.36 56.98,8.36 57.33,8 62.74,8 66.85,12.12 66.85,14.18 67,14.33 v1(67.59,14.33)
  BOTTOM w0.203: v1(67.59,14.33) 68.12,14.33 68.55,14.76 68.55,15.87 68.44,15.99 68.44,16.04 68.35,16.13 68.35,16.87 68.2,17.02 67.82,17.02 66.47,18.36 65.38,18.36 64.42,19.32 64.18,19.32 63.92,19.58 63.32,19.58 62.84,20.06 62.84,20.83 62.48,21.18 61.98,21.18 61.39,20.6 v1(60.45,20.6)
HOMEX_ISO: length 88.7
  TOP w0.203: v1(22.48,57.91) 23.24,58.67 25.43,58.67 25.91,59.16 41.38,59.16 U7.11 ; v1(16.98,35.04) 16.98,45.56 17.04,45.62 17.04,46.74 v1(17.65,47.35) ; v1(18.67,57.4) 18.67,51.28 18.06,50.67 18.06,50.44 17.9,50.29 17.65,50.29 v1(17.27,49.91) ; v1(14.48,30.35) 13.65,29.53 U8.1 ; P1.10 7.63,28.92 11.6,28.92 14.08,31.39 16.6,31.39 16.63,31.37 v1(17.4,31.37) 19.88,31.37 21.21,30.04 v1(21.21,29.46) ; U3.10 24,26.29 v1(24.38,26.67)
  BOTTOM w0.203: v1(16.98,35.04) 16.98,34.33 17.4,33.91 v1(17.4,31.37) 15.49,31.37 v1(14.48,30.35) ; v1(17.65,47.35) 17.65,47.88 17.4,48.13 17.4,49.25 17.27,49.38 v1(17.27,49.91) ; v1(21.21,29.46) 24,26.67 v1(24.38,26.67) ; v1(18.67,57.4) 19.33,58.06 20.19,58.06 20.8,58.67 21.72,58.67 v1(22.48,57.91)
HOMEY: length 81.3
  TOP w0.203: U3.5 30.1,23.75 30.1,26.04 J4.4 35.84,23.6 35.84,23.59 35.84,21.62 35.84,20.95 37.03,19.76 37.78,19.76 38.21,19.33 39.77,19.33 40.2,19.76 56.19,19.76 56.63,19.33 58.18,19.33 58.49,19.63 59.5,19.63 59.98,19.63 60.03,19.58 60.87,19.58 60.92,19.63 62.68,19.63 64.08,21.04 64.08,21.49 65.38,22.78 67.21,22.78 68.5,21.49 68.5,20.29 v1(69.11,19.68) ; J18.3 54.36,6.25 55.04,6.93 55.53,6.93 56.14,7.54 56.64,7.54 57,7.19 63.07,7.19 63.43,7.54 65.07,7.54 68.46,10.93 68.58,10.93 68.96,11.3 v1(68.96,16.38)
  BOTTOM w0.203: 68.76,17.4 68.76,17.81 69.11,18.16 v1(69.11,19.68) ; 68.76,17.4 68.76,16.95 ; 68.76,17.4 68.76,16.88 68.94,16.69 68.96,16.63 68.96,16.61 v1(68.96,16.38)
HOMEY_ISO: length 98.7
  TOP w0.203: P1.12 10.41,20.6 12.29,20.6 12.89,21.2 19.54,21.2 20.96,22.61 21.37,22.61 22.51,23.75 ; 22.51,23.75 22.18,23.75 21.56,24.36 21.56,24.38 21.46,24.48 21.46,27.84 21.23,28.07 21.17,28.07 19.14,30.1 v1(18.67,30.1) ; 22.51,23.75 U3.12 ; v1(18.67,50.42) 19.33,51.08 19.33,59.33 v1(19.94,59.94) ; v1(18.17,35.48) 18.17,36.02 18.03,36.15 18.03,45.59 v1(17.65,45.97) ; v1(17.4,29.49) 16.74,28.83 15.88,28.83 13.97,26.92 U8.2 ; U7.12 47.3,63.75 46.36,64.69 38.98,64.69 38.43,64.14 38.43,64.03 35.62,61.21 25.53,61.21 24.89,60.58 24.39,60.58 24.12,60.84 24.07,60.84 v1(23.7,61.22)
  BOTTOM w0.203: v1(17.4,29.49) 18.01,30.1 v1(18.67,30.1) 18.67,34.98 v1(18.17,35.48) ; v1(19.94,59.94) 20.32,60.32 20.53,60.32 21.06,60.85 21.54,61.33 22.04,61.33 22.16,61.21 23.16,61.21 23.16,61.22 v1(23.7,61.22) ; v1(17.65,45.97) 18.19,46.51 18.19,46.86 18.67,47.34 v1(18.67,50.42)
HOMEZ: length 64.1
  TOP w0.203: v1(70.87,15.75) 70.87,11.18 J20.3 ; v1(70.87,18.41) 70.38,17.93 69.71,17.93 69.63,18.01 68.42,18.01 68.42,18.02 67.07,18.02 67.01,17.96 65.21,17.96 64.47,18.69 62.2,18.69 62.07,18.82 61.26,18.82 61.21,18.77 59.69,18.77 59.64,18.82 58.82,18.82 58.52,18.52 56.29,18.52 55.86,18.95 40.54,18.95 40.1,18.52 37.87,18.52 37.44,18.95 36.44,18.95 36.19,18.69 35.66,18.69 J4.2 30.35,21.21 28.35,21.21
  BOTTOM w0.203: v1(70.87,18.41) 70.49,18.04 70.49,16.13 v1(70.87,15.75)
HOMEZ_ISO: length 92.3
  TOP w0.203: v1(16.34,47.42) 16.34,46.89 16.13,46.68 v1(16.13,35.79) ; 22.95,21.21 v1(21.21,21.21) ; v1(16.64,30.23) 17.27,30.23 17.4,30.1 17.65,30.1 18.01,29.74 18.01,29.24 17.36,28.59 17.36,27.85 18.29,26.92 U8.13 18.72,26.92 19.55,26.1 19.55,24.59 19.67,24.46 v1(19.67,24.38)
  BOTTOM w0.203: v1(16.64,30.23) 17.01,30.6 17.17,30.6 17.3,30.73 17.32,30.73 17.35,30.76 17.65,30.76 18.01,31.12 18.01,34.57 17.59,34.99 17.59,35.29 17.09,35.79 v1(16.13,35.79) ; v1(21.21,21.21) 21.21,22.85 v1(19.67,24.38) ; v1(16.34,47.42) 15.81,47.42 15.73,47.5 13.97,47.5 9.46,52.01 9.04,52.01 ; 9.04,52.01 P1.15 ; 9.04,52.01 9.3,52.27 9.3,52.54 19.17,62.41 19.61,62.41 20.01,62.81 24.52,62.81 24.57,62.86 26.23,62.86 26.28,62.81 27.06,62.81 28.27,64.03 28.27,64.14 28.82,64.69 32.14,64.69 32.69,64.14 32.69,64.03 33.9,62.81 50.11,62.81 U7.13
LIMITX: length 88.5
  TOP w0.203: U3.6 28.8,25.02 29.42,25.64 29.42,26.54 30.51,27.63 30.51,28.98 J4.5 36.25,25.73 36.25,21.12 37.2,20.17 37.95,20.17 38.38,19.74 39.6,19.74 40.03,20.17 56.36,20.17 56.79,19.74 58.01,19.74 58.68,20.4 59.12,20.4 59.48,20.04 59.67,20.04 60.15,20.04 60.2,19.99 60.7,19.99 60.76,20.04 61.7,20.04 v1(62.23,20.57) ; v1(67.74,16.39) 67.74,15.29 68.21,14.82 68.21,14.36 68.21,14.35 68.21,14.35 68.21,14.33 68.21,14.33 68.21,14.31 68.2,14.31 68.2,14.29 68.2,14.28 68.2,14.07 67.28,13.16 67.28,11.69 63.55,7.95 63.26,7.95 62.91,7.59 57.16,7.59 56.81,7.95 55.97,7.95 55.36,7.34 45.01,7.34 44.75,7.59 44.25,7.59 43.99,7.34 43.51,7.34 42.42,6.25 J17.3
  BOTTOM w0.203: v1(62.23,20.57) 62.23,19.81 62.86,19.18 63.75,19.18 64.01,18.92 64.25,18.92 65.21,17.96 66.18,17.96 v1(67.74,16.39)
LIMITX_ISO: length 28.7
  TOP w0.203: U8.3 10.41,25.65 9.69,26.38 ; 9.69,26.38 9.45,26.15 7.63,26.15 P1.11 ; 9.69,26.38 11.71,28.41 11.71,28.45 14.25,30.99 16.43,30.99 16.46,30.96 16.94,30.96 17.15,30.76 17.58,30.76 17.63,30.71 19.1,30.71 21.21,28.6 21.28,28.6 21.87,28.01 21.87,25.66 22.51,25.02 U3.11
LIMITY: length 63.9
  TOP w0.203: v1(69.84,18.8) 69.47,18.42 69.35,18.42 69.34,18.41 68.59,18.41 68.58,18.42 66.9,18.42 66.84,18.36 65.38,18.36 64.64,19.1 63.97,19.1 63.97,19.1 63.38,19.1 63.38,19.1 62.36,19.1 62.24,19.23 61.09,19.23 61.04,19.18 59.86,19.18 59.81,19.23 59.33,19.23 58.66,19.23 58.35,18.92 56.46,18.92 56.03,19.35 40.37,19.35 39.94,18.92 38.04,18.92 37.61,19.35 36.86,19.35 35.43,20.78 35.38,21.03 35.38,21.51 J4.3 31.75,24.11 30.48,22.84 30.48,22.48 U3.4 ; J19.3 66.29,4.67 66.42,4.8 66.42,7.11 69.84,10.53 v1(69.84,16.26)
  BOTTOM w0.203: v1(69.84,18.8) v1(69.84,16.26)
LIMITY_ISO: length 29
  TOP w0.203: U3.13 21.9,22.48 21.63,22.2 21.34,22.2 20.6,21.46 20.6,21.18 19.37,19.95 17.84,19.95 17.83,19.96 17.06,19.96 17.05,19.95 9.5,19.95 6.54,22.91 P1.13 ; v1(9.14,23.11) 10.41,24.38 U8.4
  BOTTOM w0.203: v1(9.14,23.11) 6.4,23.11 6.2,22.91 P1.13
LIMITZ: length 70.1
  TOP w0.203: J21.3 78.23,15.75 v1(72.01,15.75) ; U3.2 29.34,19.94 29.47,20.07 J4.1 33.72,20.07 35.49,18.29 36.36,18.29 36.61,18.54 37.27,18.54 37.71,18.11 40.27,18.11 40.7,18.54 55.69,18.54 56.12,18.11 58.69,18.11 58.9,18.32 58.99,18.41 59.48,18.41 59.53,18.36 61.38,18.36 61.43,18.41 61.9,18.41 62.21,18.11 62.86,18.11 63.04,18.29 64.3,18.29 65.04,17.55 67.18,17.55 67.24,17.61 68.25,17.61 68.26,17.6 69.47,17.6 69.54,17.53 70.71,17.53 70.83,17.4 v1(71.12,17.4)
  BOTTOM w0.203: v1(72.01,15.75) 71.12,16.64 v1(71.12,17.4)
LIMITZ_ISO: length 97.5
  TOP w0.203: v1(11.68,21.21) 12.71,22.24 12.71,22.49 13.34,23.11 U8.5 ; 2.79,47.18 3.39,46.58 3.68,46.58 4.04,46.23 4.04,45.72 3.99,45.67 3.99,33.43 4.85,32.56 5.89,32.56 6.77,31.69 13.22,31.69 13.75,32.21 13.79,32.21 13.96,32.38 18.34,32.38 18.49,32.54 19.86,32.54 20.52,31.88 U2.6 23.6,31.23 23.84,31.23 24.02,31.05 ; 2.79,47.18 2.79,48.51 v1(3.43,49.15) ; 2.79,47.18 2.79,24.12 6.16,20.75 7.45,20.75 7.46,20.75 8.13,20.75 9.58,19.3 v1(11.68,19.3) 12.95,19.3 13.18,19.53 17.21,19.53 17.23,19.56 17.66,19.56 17.68,19.55 18.09,19.55 18.1,19.53 19.52,19.53 19.93,19.94 U3.15 23.2,19.94
  BOTTOM w0.203: v1(3.43,49.15) 2.57,49.15 2.18,49.53 2.18,50.04 2.54,50.39 3.62,50.39 4.78,49.24 P1.16 ; v1(11.68,21.21) v1(11.68,19.3)
RESET: length 167
  TOP w0.203: J14.8 112.59,31.37 108.63,35.33 103.21,35.33 102.66,34.77 100.24,32.36 98.46,32.36 97.47,31.37 J13.8 93.54,31.37 92.27,32.63 82.86,32.63 81.59,31.37 J16.8 74.63,31.37 73.83,32.17 73.41,32.59 72.83,33.17 63.06,33.17 61.26,31.37 J11.8 55.44,31.37 54.91,31.9 54.87,31.96 54.84,32.04 54.82,32.12 54.82,32.13 54.19,32.76 54.08,32.76 53.97,32.87 53.47,32.87 53.36,32.76 45.25,32.76 43.86,31.37 J15.8 38.99,32.36 38.82,32.53 38.56,32.53 38.48,32.55 38.39,32.57 37.79,32.57 v1(37.34,33.02) ; v1(115.57,55.37) 115.34,55.14 115.34,51.1 116.03,50.41 116.03,50.22 116.46,49.78 116.46,37.08 v1(117.35,36.2) ; v1(115.95,63.24) 115.95,58.85 v1(115.39,58.29) ; J25.8 115.67,65.81 108.63,65.81 108.12,66.31 97.66,66.31 96.64,65.29 95.29,65.29 95.26,65.33 90.73,65.33 J24.8 ; v1(36.45,34.86) v1(36.45,37.72) ; J3.4 34.09,38.66 34.09,38.5 30,34.42 28.35,34.42
  BOTTOM w0.203: v1(115.39,58.29) 115.44,58.34 115.44,57.96 115.47,57.93 115.47,56.46 115.67,56.26 115.67,55.75 115.57,55.65 v1(115.57,55.37) ; J3.4 v1(36.45,37.72) ; v1(37.34,33.02) 36.45,33.91 v1(36.45,34.86) ; J14.8 117.83,34.65 117.83,35.71 v1(117.35,36.2) ; J25.8 v1(115.95,63.24)
RESET_ISO: length 70
  TOP w0.203: 31.7,13.84 30.84,12.98 23.37,12.98 23.01,13.34 23.01,14.2 18.42,18.79 18.26,18.79 17.92,19.14 17.39,19.14 17.2,18.95 13.55,18.95 12.91,18.31 9.99,18.31 7.96,20.35 6,20.35 1.52,24.82 v1(1.52,33.27) ; 31.7,13.84 v1(31.75,13.89) ; 31.7,13.84 31.62,13.84 ; P1.9 14.74,33.99 14.94,33.79 15.51,33.21 18.01,33.21 18.16,33.35 19.81,33.35 20.88,34.42 22.95,34.42
  BOTTOM w0.203: U7.30 32.13,14.35 32.13,14.27 v1(31.75,13.89) ; v1(1.52,33.27) 4.62,33.27 P1.9
SCL: length 143.5
  TOP w0.203: J13.1 J16.1 68.78,49.15 67.21,50.72 65.38,50.72 63.8,49.15 J11.1 v1(40.89,49.15) ; J13.1 95.5,48.12 97.38,46.24 97.38,44.48 102.64,39.22 109.96,39.22 110.19,38.99 111.42,38.99 112.01,39.58 112.01,41.66 113.08,42.72 113.08,46.64 114.55,48.12 J14.1 114.55,50.31 114.3,50.57 v1(114.3,56.64) ; J13.1 92.33,52.32 v1(92.33,56.26) ; J25.9 118.69,63.45 116.7,63.45 115.49,64.66 115.49,64.78 114.94,65.33 114.16,65.33 113.61,64.78 113.61,64 114.15,63.47 114.15,59.52 114.17,59.5 v1(114.17,58.17) ; J15.1 35.31,52.83 R31.1 33,52.83 32.19,53.64 31.31,53.64 30.75,53.09 U10.6
  BOTTOM w0.203: v1(114.3,56.64) 114.3,57.51 114.17,57.63 v1(114.17,58.17) ; J15.1 v1(40.89,49.15) ; J24.9 v1(92.33,56.26)
SCL_ISO: length 14.8
  TOP w0.203: U7.1 19.66,63.14 20.78,63.14 21.82,62.1 21.82,61.59 22.2,61.21 22.2,60.93 22.27,60.85 22.27,60.35 21.82,59.89 21.82,59.86 21.82,59.86 21.82,59.7 21.82,59.26 21.06,58.5 21.06,57.83 21.06,57.32 21.82,56.56 21.82,54 22.73,53.09 U10.3
SDA: length 144.3
  TOP w0.203: v1(116.22,56.52) 116.22,55.67 116.18,55.62 116.18,55.12 115.83,54.77 115.83,51.56 v1(116.2,51.18) ; J14.2 114.55,45.58 113.49,44.51 113.49,42.55 112.42,41.49 112.42,39.42 111.59,38.58 110.02,38.58 109.79,38.82 102.47,38.82 96.98,44.31 96.98,45.14 J13.2 J16.2 67.51,46.61 67.21,46.3 65.38,46.3 65.07,46.61 J11.2 J15.2 40.06,47.68 40.06,50.5 37.72,52.83 R30.1 36.7,52.88 35.74,53.85 33.63,53.85 33.43,54.05 31.31,54.05 31,54.36 U10.7 ; v1(116.32,58.29) 120.4,62.37 120.4,62.61 J25.10 ; v1(94.87,50.8) 93.22,52.45 v1(93.22,56.26)
  BOTTOM w0.203: v1(116.22,56.52) 116.22,57.07 116.32,57.17 v1(116.32,58.29) ; v1(93.22,56.26) 94.87,57.91 94.87,64.39 ; J13.2 94.44,47.68 94.44,50.37 v1(94.87,50.8) ; J14.2 115.62,47.68 115.62,50.6 v1(116.2,51.18)
SDA_ISO: length 11.8
  TOP w0.203: U10.2 22.76,54.36 22.22,54.89 22.22,56.73 21.46,57.49 21.46,58.33 22.22,59.09 22.22,59.53 22.22,59.72 22.68,60.18 22.68,61.02 22.61,61.09 22.61,61.38 22.23,61.76 22.23,62.27 21.59,62.91 U7.2
SHEILDING_GND: length 252.8
  TOP w0.203: J14.12 J13.12 J16.12 68.91,21.21 68.91,21.66 67.38,23.19 65.21,23.19 63.68,21.66 63.68,21.42 63.47,21.21 60.81,21.21 59.46,21.21 59.46,21.21 58.4,21.21 58.39,21.21 J11.12 J15.12 ; J21.1 v1(85.09,0.63) ; J20.1 v1(73.15,0.76) ; 25.27,3.81 v1(25.27,0.89) ; J18.1 v1(49.28,0.63) ; J17.1 v1(37.34,1.14) ; J19.1 v1(61.21,0.76) ; v1(96.9,18.03) v1(96.9,0.63)
  BOTTOM w0.203: 102.36,1.27 102.49,1.4 X6.1 ; J28.3 121.54,1.4 ; J13.12 95.5,19.43 v1(96.9,18.03) ; X7.1 126.39,58.67
  BOTTOM w0.406: 99.31,67.94 109.61,67.94 109.69,68.02 125.97,68.02 126.03,68.01 126.12,67.97 126.16,67.94 126.31,67.8 126.33,67.76 126.37,67.67 126.39,67.57 126.39,1.86 125.6,1.08 125.6,0.51 ; 99.31,67.94 72.42,67.94 72.01,67.54 J24.1 ; 99.31,67.94 J25.1
SPAREOUT: length 108.3
  TOP w0.203: v1(41.4,49.91) 42.06,49.91 42.17,49.81 55.46,49.81 71.87,66.21 80.34,66.21 J24.5 83.38,64.39 85.71,66.72 v1(96.04,66.72) ; v1(96.77,64.52) 98.17,65.91 107.96,65.91 J25.5 ; U2.11 29.34,31.88 29.34,32.44 31.14,34.24 32.78,34.24 32.83,34.29 J3.2 36.16,34.29 36.2,34.26 36.7,34.26 37.06,34.61 37.06,34.9 v1(37.46,35.31)
  BOTTOM w0.203: v1(41.4,49.91) 41.78,49.53 41.78,40.47 41.38,40.07 41.38,38.07 40.06,36.75 40.06,36.01 39.35,35.31 v1(37.46,35.31) ; v1(96.04,66.72) 96.77,65.98 v1(96.77,64.52)
SPINDLE_CNTRL: length 112.3
  TOP w0.203: J24.6 85.92,64.39 87.67,66.14 95.69,66.14 95.72,66.11 96.29,66.11 97.5,67.31 v1(109.98,67.31) ; v1(42.42,50.42) 55.5,50.42 71.7,66.62 81.97,66.62 v1(82.8,65.79) ; v1(41.78,37.46) 39.29,34.98 38.55,34.98 37.2,33.63 37.09,33.63 36.73,33.27 36.73,33.16 36.07,32.5 36.07,31.75 J3.1 32.72,33.83 31.31,33.83 30.68,33.21 30.68,32.49 28.8,30.61 U2.10
  BOTTOM w0.203: v1(82.8,65.79) 83.18,65.41 83.69,65.41 J24.6 ; v1(109.98,67.31) 109.98,66.42 J25.6 ; v1(42.42,50.42) 42.19,50.19 42.19,40.3 41.78,39.9 v1(41.78,37.46)
SPINDLE_CNTRL_ISO: length 100.8
  TOP w0.203: v1(6.6,50.42) 6.6,48.04 P1.17 ; v1(3.43,45.97) 3.43,33.41 4.68,32.16 5.72,32.16 6.6,31.28 13.39,31.28 13.91,31.8 13.95,31.8 14.13,31.98 18.51,31.98 18.66,32.13 19.69,32.13 21.22,30.61 U2.7
  BOTTOM w0.203: v1(3.43,45.97) 4.92,45.97 4.94,46 7.7,46 P1.17 ; U7.15 54.92,63.75 53.58,65.1 21.61,65.1 19.99,63.48 19.99,63.36 19.44,62.81 19,62.81 9.13,52.95 9.11,52.95 8.84,52.67 8.56,52.95 7.78,52.95 7.23,52.39 7.23,51.05 v1(6.6,50.42)
VMOT: length 2
  TOP w0.203: v1(103.25,39.88) v1(104.27,39.88) ; v1(105.41,40) v1(106.43,40)
  vias: v1(104.01,34.04) v1(105.16,33.91) v1(106.17,34.04) v1(107.19,34.04) v1(107.7,40) v1(108.08,34.04)
N92754: length 38.7
  TOP w0.203: D4.1 123.14,46.99 121.49,45.34 121.49,38.84 117.47,34.82 116.97,34.82 116.41,35.38 110.87,35.38 109.3,36.95 102.54,36.95 100.51,34.92 v1(97.28,34.92)
  BOTTOM w0.203: J13.7 96.52,34.92 v1(97.28,34.92)
N92822: length 20.8
  TOP w0.203: D5.1 123.14,50.29 121.08,48.23 121.08,39.07 117.6,35.59 117.37,35.59 v1(117.22,35.43)
  BOTTOM w0.203: J14.7 115.7,33.91 v1(117.22,35.43)
N94102: length 73
  TOP w0.203: J11.7 62.65,33.91 62.72,33.98 74.87,33.98 75.39,33.47 76.01,32.84 76.9,32.84 77.5,33.45 94.46,33.45 95.06,32.84 95.95,32.84 96.71,33.6 100.34,33.6 101.85,35.11 102.25,35.52 102.88,36.14 108.97,36.14 111.5,33.6 112.78,33.6 113.54,32.84 115.57,32.84 116.13,33.4 117.2,33.4 122.3,38.5 122.3,39.01 123.19,39.9 D2.1
N94406: length 59.2
  TOP w0.203: v1(37.46,37.46) 37.85,37.85 40.73,37.85 41.36,38.48 43.81,38.48 44.77,37.52 57.85,37.52 58.91,36.45 J16.6 ; v1(36.32,39.88) 36.32,42.93 35.86,43.38 35.86,44.89 35.24,45.52 33.73,45.52 J2.3 31.75,46.47 29.34,44.06 29.34,43.81 U1.12
  BOTTOM w0.203: v1(37.46,37.46) 37.46,38.2 36.32,39.34 v1(36.32,39.88)
N94454: length 72.8
  TOP w0.203: U1.10 28.8,41.27 29.94,42.42 J2.1 ; v1(40.13,39.88) 41.12,38.89 44.04,38.89 45.01,37.92 58.01,37.92 58.42,37.52 76.9,37.52 77.96,36.45 J13.6
  BOTTOM w0.203: v1(40.13,39.88) 40.13,38.62 39.43,37.92 38.55,37.92 36.98,39.49 36.98,40.08 36.57,40.49 33.68,40.49 J2.1
N94482: length 92.6
  TOP w0.203: J3.5 33.68,40.79 33.68,38.67 30.7,35.69 U2.14 ; v1(40.77,40.89) 41.61,40.06 57.85,40.06 59.98,37.92 95.54,37.92 95.87,37.59 109.24,37.59 110.38,36.45 J14.6
  BOTTOM w0.203: v1(40.77,40.89) 40.36,40.49 39.88,40.49 39.85,40.46 37.39,40.46 36.96,40.89 35.81,40.89 J3.5
N94508: length 46.2
  TOP w0.203: J11.3 J15.3 ; 28.35,47.62 29,48.27 29.24,48.27 29.42,48.45 29.42,49.74 29.58,49.9 29.58,52.26 29.4,52.44 27.9,52.44 27.7,52.64 27.7,54.8 27.88,54.98 30.62,54.98 30.76,55.12 J2.6
  BOTTOM w0.203: J2.6 37.8,49.07 37.8,46.13 38.33,45.59 38.33,45.51 38.86,44.97 38.86,43.94
N94542: length 90.4
  TOP w0.203: J15.7 39.73,33.17 53.2,33.17 53.3,33.27 54.14,33.27 54.24,33.17 54.35,33.17 54.68,32.84 62.16,32.84 62.89,33.57 74.71,33.57 75.28,32.99 75.84,32.44 77.06,32.44 77.67,33.04 94.29,33.04 94.89,32.44 96.11,32.44 96.44,32.77 100.07,32.77 102.25,34.94 103.05,35.73 108.8,35.73 111.77,32.77 113.04,32.77 113.37,32.44 115.74,32.44 116.07,32.77 119.13,32.77 D6.1
N94754: length 4
  TOP w0.203: R21.1 R22.2 114.86,10.92 115.43,10.35 115.43,9.99 U4.4
N94942: length 57.1
  TOP w0.203: J16.3 75.39,43 56.96,43 56.94,43.03 39.46,43.03 39.43,43 38.3,43 36.68,44.63 36.68,48.03 v1(34.16,50.55) ; J2.4 30.23,48.52 30.23,46.52 28.8,45.09 28.35,45.09
  BOTTOM w0.203: v1(34.16,50.55) 33.65,50.04 J2.4
N94982: length 70
  TOP w0.203: v1(37.72,44.45) 38.4,45.14 76.9,45.14 77.96,44.07 J13.3 ; 28.35,42.55 29.34,42.55 J2.2
  BOTTOM w0.203: v1(37.72,44.45) 36.31,44.45 35.24,43.38 33.32,43.38 J2.2
N95000: length 99.6
  TOP w0.203: 28.35,36.96 31.24,36.96 33.27,38.99 33.27,42.93 J3.6 ; v1(37.72,45.34) 38.01,45.34 38.21,45.54 95.54,45.54 96.57,44.51 96.57,44.14 102.3,38.41 109.62,38.41 109.85,38.18 111.76,38.18 112.23,38.65 112.83,39.25 112.83,39.82 113.49,40.48 113.49,41.97 114.55,43.04 J14.3
  BOTTOM w0.203: v1(37.72,45.34) 35.69,45.34 J3.6
N95234: length 6.3
  TOP w0.203: J23.1 14.94,5.33 13.84,4.24 C16.2 ; 10.41,4.95 11.32,4.05 11.32,3.24 12.14,2.41 R28.2
N95510: length 55.3
  TOP w0.203: J16.7 77.44,33.91 78.51,34.98 95.95,34.98 96.61,34.32 100.47,34.32 100.68,34.52 102.71,36.55 109.13,36.55 110.7,34.98 115.15,34.98 115.71,34.42 117.64,34.42 121.89,38.67 121.89,42.39 D3.1
N95918: length 4
  TOP w0.203: U5.4 8.02,3.35 8.02,2.98 8.59,2.41 R29.2 R28.1
N96112: length 5.6
  TOP w0.203: U8.6 17.22,21.84 17.22,22.05 18.29,23.11 U8.10
N96120: length 121.3
  TOP w0.203: U8.8 v1(17.4,20.57) ; U7.16 55.65,66.78 5.72,66.78 0.91,61.97 0.91,24.85 5.83,19.94 7.79,19.94 9.82,17.91 13.11,17.91 13.74,18.54 17.09,18.54 17.11,18.53 v1(17.64,18.53)
  BOTTOM w0.203: v1(17.4,20.57) 17.4,19.3 17.64,19.06 v1(17.64,18.53)
N96124: length 1.3
  TOP w0.203: U8.12 U8.11
N105302: length 21.9
  TOP w0.203: R32.1 107.95,52.4 108.52,51.83 108.52,51.65 108.66,51.51 108.66,50.34 108.48,50.16 108.28,50.16 107.95,49.83 107.95,49.15 107.31,49.15 107.07,48.91 107.07,46.93 107.25,46.75 107.94,46.75 108.15,46.54 108.15,43.66 108.32,43.5 108.32,41.99 108.51,41.8 109.41,41.8 109.4,41.78 109.52,41.78 109.52,41.78 109.7,41.61 109.7,40.37 109.82,40.25 109.82,39.99 109.87,39.94 109.87,39.88 110.36,39.4 111.25,39.4 111.61,39.75 111.61,42.95 111.51,43.05 U6.4
N121730: length 38.9
  TOP w0.203: 46.02,35.69 45.58,35.69 43.19,38.07 41.53,38.07 40.61,37.15 39.69,37.15 J15.6 ; v1(40.51,42.42) 39.61,42.42 39.43,42.6 38.14,42.6 36.27,44.46 36.27,47.58 33.55,50.29 33.55,50.77 J2.5 30.51,51.33 30.51,50.25 29.83,49.57 29.83,47.59 29.24,47 29,47 U1.14
  BOTTOM w0.203: J15.6 40.97,38.43 40.97,40.23 41.38,40.64 41.38,41.55 v1(40.51,42.42)
N121766: length 11
  TOP w0.203: J11.6 56.7,35.75 53.41,35.75 53.34,35.81 53.01,35.81 51.49,34.29 R35.1 51.38,34.29 49.99,35.69 47.93,35.69
N941580: length 2.5
  TOP w0.203: D6.2 124.54,36.7 123.11,35.28 123.11,34.92 R27.1
N954500: length 2.4
  TOP w0.203: D2.2 124.66,40.13 123.11,38.58 123.11,38.48 R23.1
N954660: length 2.5
  TOP w0.203: R24.1 123.11,41.91 123.11,42.14 124.66,43.69 D3.2
N954820: length 2.4
  TOP w0.203: R25.1 123.11,45.34 123.11,45.44 124.66,46.99 D4.2
N954980: length 2.4
  TOP w0.203: R26.1 123.11,48.64 123.11,48.74 124.66,50.29 D5.2

## Copper pours and planes (outline as drawn; the poured copper is in the pictures)
GND_PROTECT on BOTTOM: 66.17,13.08 25.53,13.08 20.57,8 20.57,1.78 0.25,1.78 0.25,67.82 67.18,67.82 68.83,66.42 68.83,60.2 66.42,57.78 26.04,57.78 25.91,57.91 25.91,17.78 27.18,16.51 64.39,16.51 64.64,16.76 66.29,15.11 66.29,13.21 ; 3 cut-outs
VCC_FAN on TOP: 110.87,41.91 108.71,41.91 108.46,42.16 108.46,56.77 111.51,56.77 111.51,49.28 110.87,48.64
VCC_REG on TOP (solid shape): 110.43,9.34 110.43,8.83 110.49,8.83 110.49,8.64 117.09,8.64 117.22,8.51 117.22,6.35 116.97,6.1 108.84,6.1 108.59,6.35 108.59,9.65 108.71,9.78 109.98,9.78
(no net) on TOP: 6.22,6.99 6.48,7.24 14.61,7.24 14.86,6.99 14.86,3.68 14.73,3.56 13.46,3.56 12.95,4.06 12.95,4.7 6.35,4.7 6.22,4.83
(no net) on TOP: 115.32,5.97 120.4,11.05 122.94,11.05 123.57,10.41 123.57,7.24 122.94,6.6 119.76,6.6 117.6,4.45 117.6,3.56 116.84,2.79 115.44,2.79 115.32,2.92
(no net) on TOP: 8.13,7.37 6.73,5.97 1.9,5.97 1.9,9.02 2.16,9.27 5.21,9.27 5.84,9.91 5.84,9.78 6.6,10.54 8,10.54 8.13,10.41
(no net) on TOP: 117.22,6.35 116.97,6.1 108.84,6.1 108.59,6.35 108.59,9.65 108.71,9.78 109.98,9.78 110.49,9.27 110.49,8.64 117.09,8.64 117.22,8.51
0 on BOTTOM: 0.25,0.13 0.25,67.82 126.24,67.82 126.24,0.13
SHEILDING_GND on BOTTOM: 0.25,0.25 0.25,1.52 120.02,1.52 120.02,2.92 121.03,3.94 122.3,3.94 123.32,2.92 123.32,1.52 125.73,1.52 125.73,0.25
VMOT on TOP (solid shape): 123.57,10.41 123.57,7.24 122.94,6.6 122.81,6.6 122.81,6.65 121.54,7.87 120.27,6.65 120.27,6.6 119.76,6.6 117.6,4.45 117.6,3.56 116.84,2.79 115.44,2.79 115.32,2.92 115.32,5.97 117.02,5.97 117.35,6.3 117.35,8 120.4,11.05 122.94,11.05
VMOT on TOP: 36.96,31.88 37.34,32.26 101.73,32.26 103.89,34.42 108.2,34.42 110.11,32.51 110.11,32.26 124.21,32.26 125.22,31.24 125.22,8.38 123.19,6.35 120.02,6.35 117.35,9.02 117.35,19.43 115.44,21.34 36.96,21.34 ; 12 cut-outs
VMOT on TOP: 108.08,59.94 108.08,43.69 109.35,42.42 109.35,39.88 108.71,39.24 102.62,39.24 98.17,43.69 98.17,56.77 74.55,56.77 74.17,56.39 74.17,63.88 76.2,65.91 77.09,65.91 81.79,61.21 101.6,61.21 102.87,62.48 102.87,65.15 103.51,65.79 105.03,65.79 106.05,64.77 106.05,61.98
VMOT on BOTTOM: 103.25,40.39 108.46,40.39 108.97,39.88 108.97,34.42 108.08,33.53 103.38,33.53 102.62,34.29 102.62,39.75
N92972 on TOP (solid shape): 8.13,10.41 8.13,7.37 6.42,7.37 6.1,7.04 6.1,5.97 1.9,5.97 1.9,9.02 2.16,9.27 5.21,9.27 5.67,9.73 5.73,9.76 5.8,9.74 6.6,10.54 8,10.54
N95234 on TOP (solid shape): 14.86,6.99 14.86,3.68 14.73,3.56 13.46,3.56 13.02,4 13.02,4.51 12.95,4.51 12.95,4.7 6.35,4.7 6.22,4.83 6.22,6.99 6.48,7.24 14.61,7.24

## Text on the board
TOP: CC-SA by Darren Vandervort | For opencapitalist.org
